# Altium PCB Vertical.PcbDoc
Units mm, origin at the board's own origin, x right, y up, seen from the top; angles counter-clockwise.
Board outline 51.82 x 30.48 mm, 2 copper layers (Top Layer, Bottom Layer); 19 components, 10 nets, 57 pads, 219 vias.
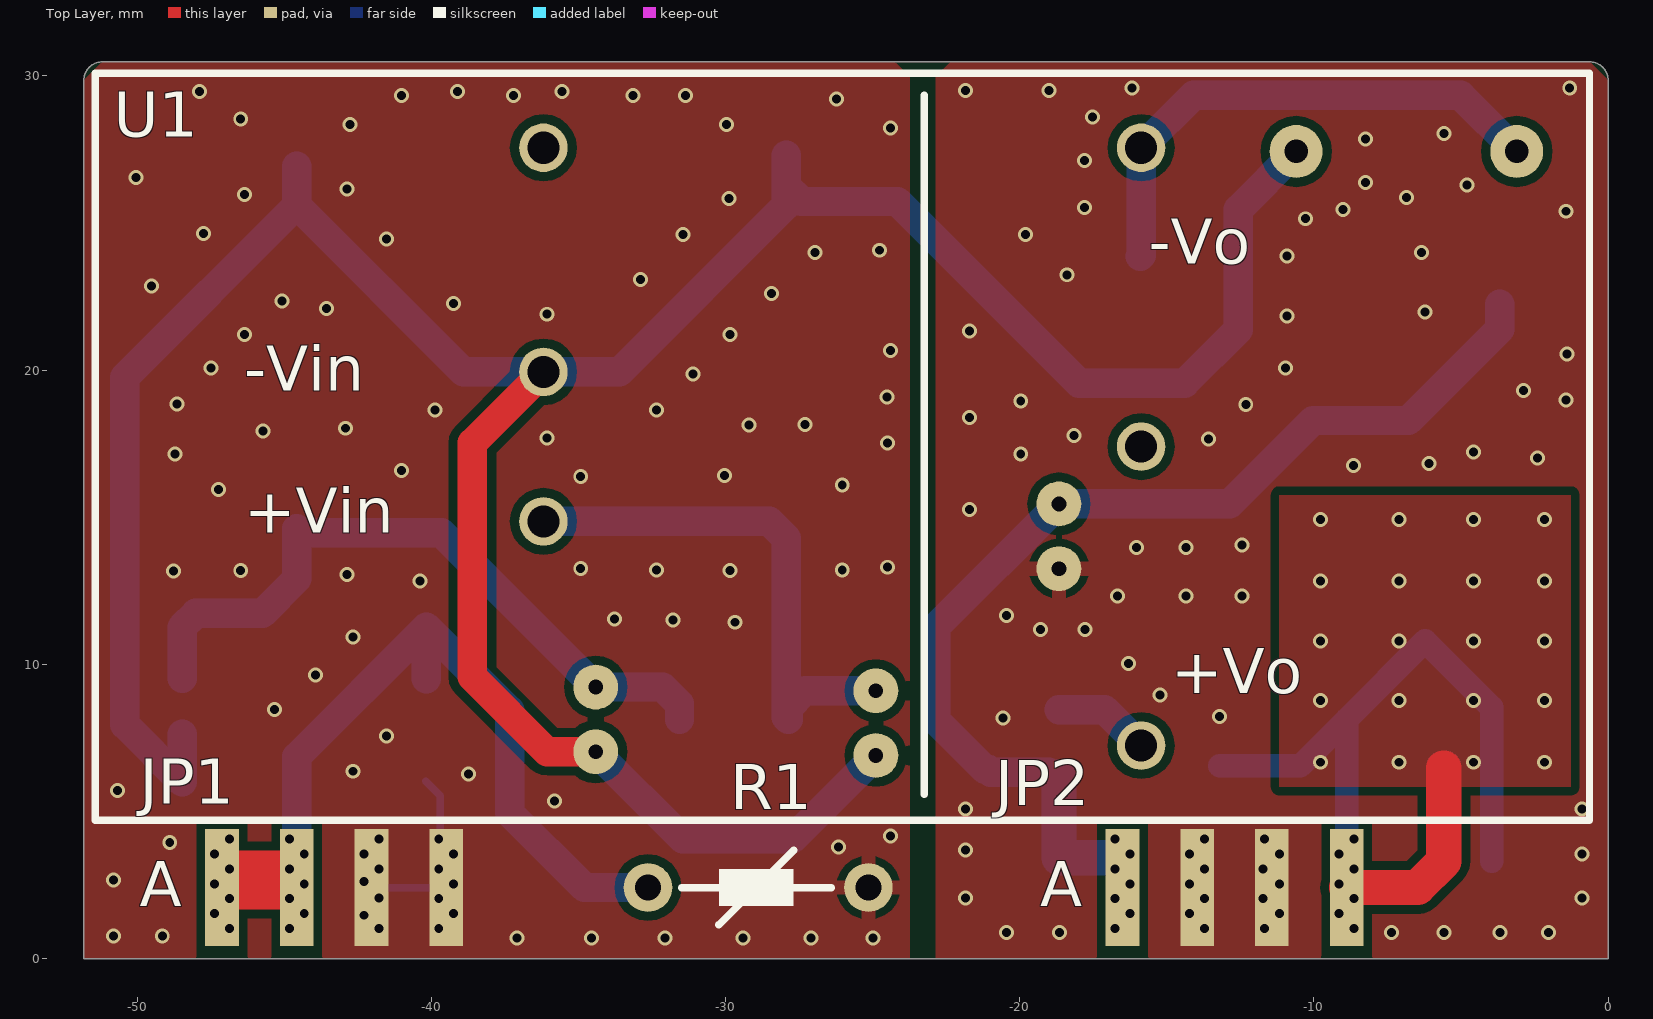
[diagram p0: Top Layer view]
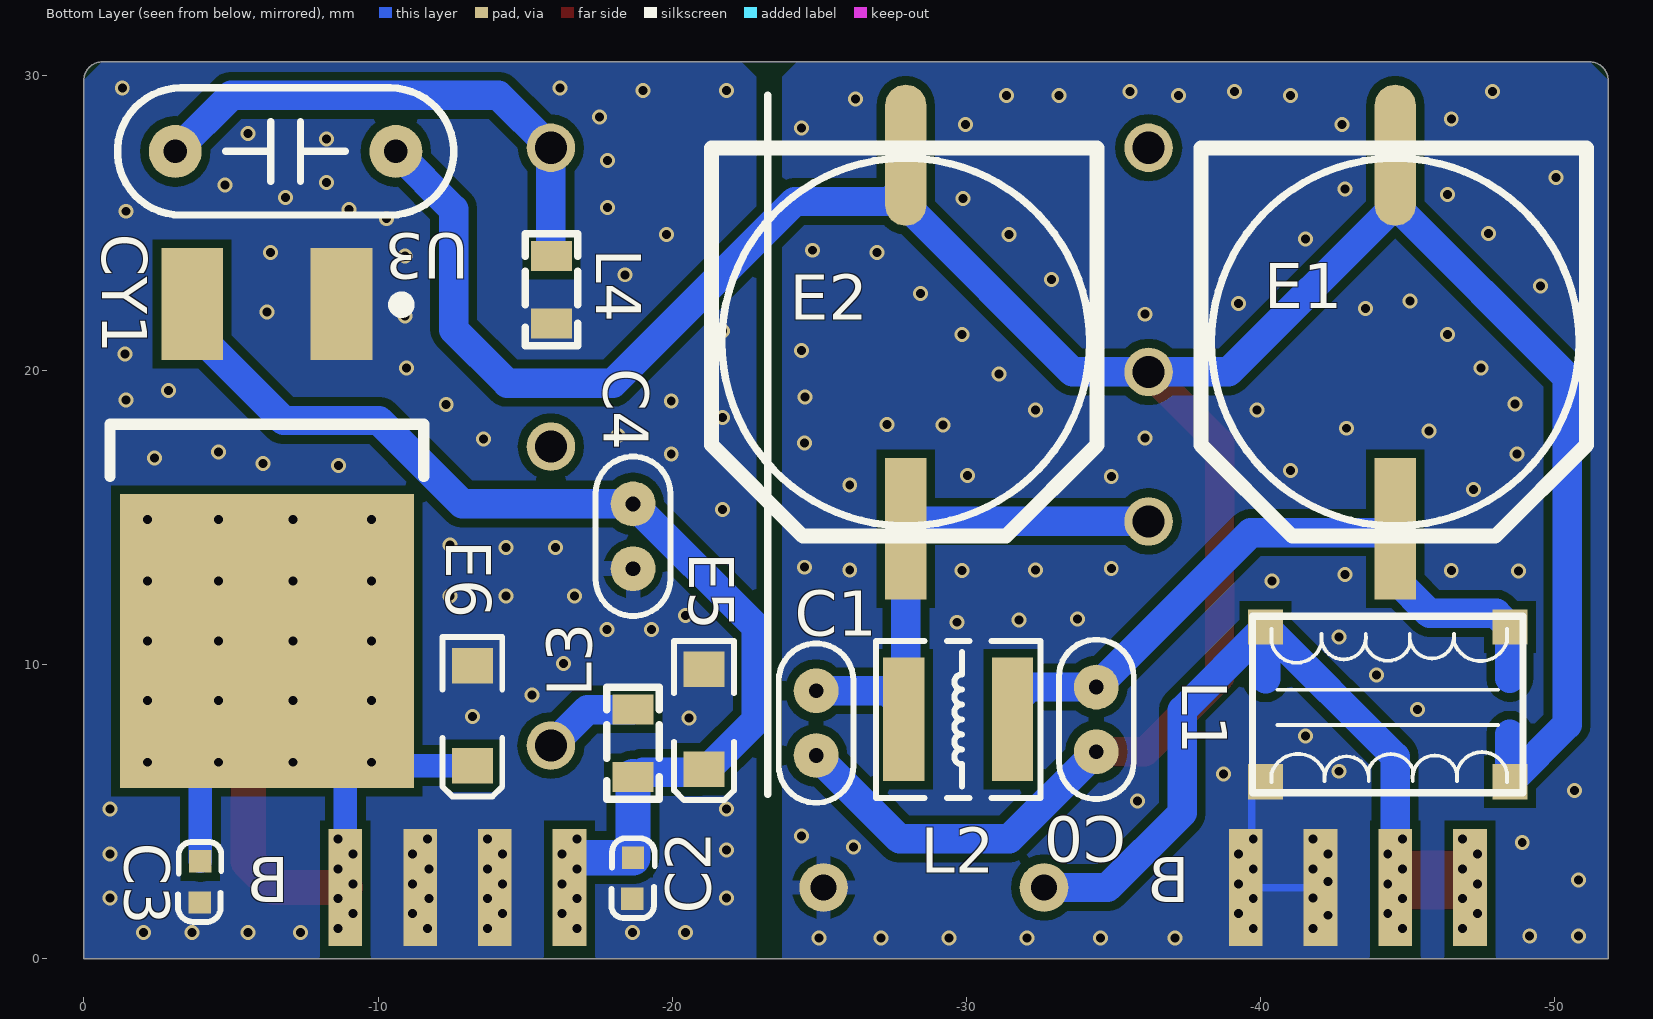
[diagram p1: Bottom Layer view, seen from below]
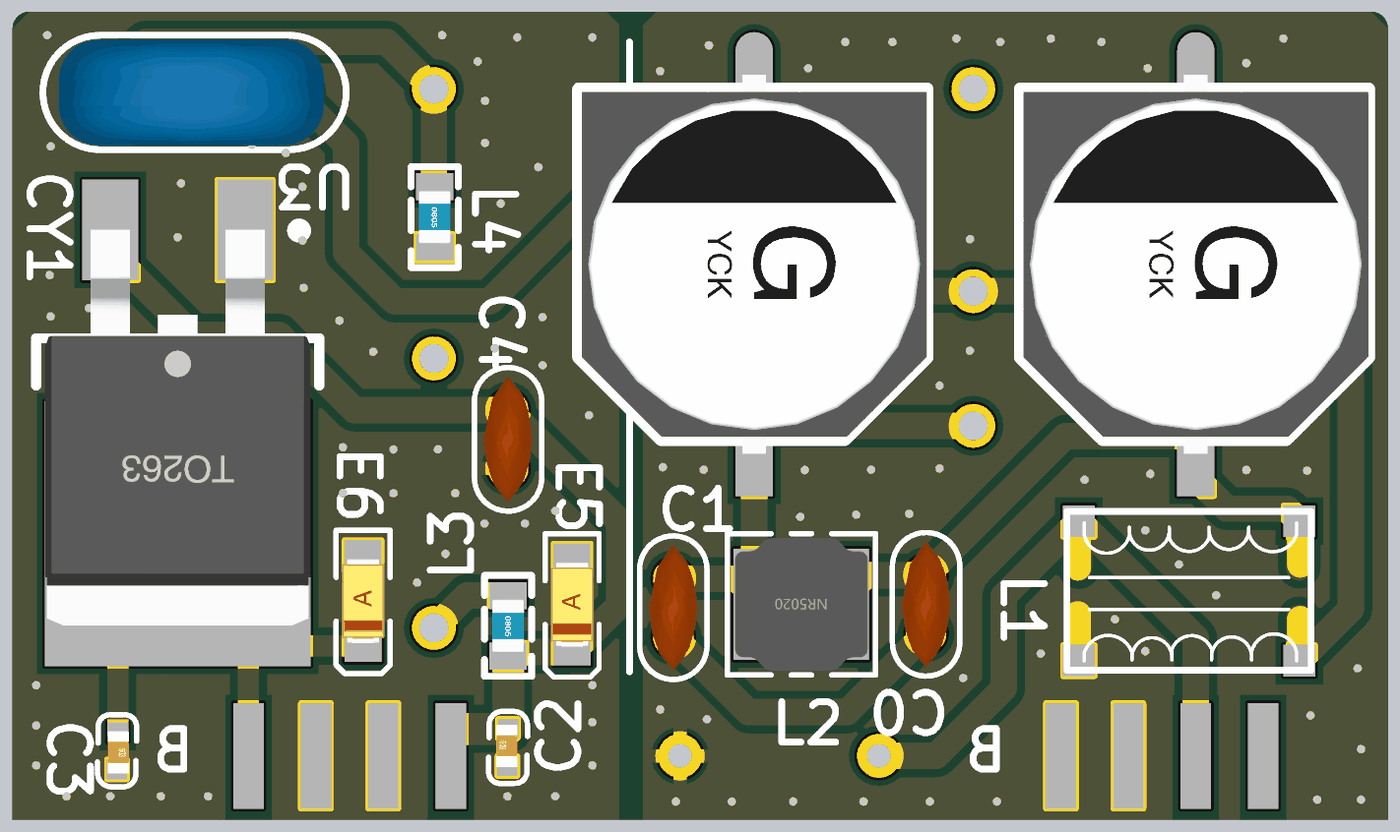
[diagram p2: 3D render of the assembled board from below, using the file's embedded part models]

## Layer stack, top to bottom
Top Solder: solder mask 0.0102, Solder Resist, Dk 3.5
Top Layer: signal copper 0.0356
Dielectric 1: dielectric 0.32, FR-4, Dk 4.8
Bottom Layer: signal copper 0.0356
Bottom Solder: solder mask 0.0102, Solder Resist, Dk 3.5

## Board outline
-51.816,0 0,0 0,29.845 ccw(c-0.635,29.845) -0.635,30.48 -51.181,30.48 ccw(c-51.181,29.845) -51.816,29.845

## Design rules (kind name [scope] priority, off if disabled: settings)
Clearance [All] p1: gap=0.3 ignorepadtopadclearanceinfootprint=FALSE except(0: Arc-Arc Arc-Track Arc-SMDPad Arc-THPad Arc-Via Arc-Text Arc-Hole Track-Track Track-SMDPad Track-THPad Track-Via Track-Text Track-Hole SMDPad-SMDPad SMDPad-THPad SMDPad-Via SMDPad-Text SMDPad-Hole THPad-THPad THPad-Via THPad-Text THPad-Hole Via-Via Via-Text Via-Hole Text-Text Text-Hole)
ComponentClearance [All] p1: gap=0.254 collisioncheckmode=3 verticalgap=0.254 showdistances=FALSE donotcheckwithout3dbody=TRUE
PlaneConnect [All] p1: planeconnectstyle=Relief reliefexpansion=0.1 reliefentries=4 reliefconductorwidth=0.4 reliefairgap=0.4
PolygonConnect [All] p1: thpad.connectstyle=Relief thpad.reliefconductorwidth=0.5 thpad.reliefentries=4 thpad.polygonreliefangle="90 Angle" thpad.airgapwidth=0.254 smdpad.connectstyle=Direct smdpad.reliefconductorwidth=0.254 smdpad.reliefentries=4 smdpad.polygonreliefangle="90 Angle" smdpad.airgapwidth=0.254 via.connectstyle=Direct via.reliefconductorwidth=0.254 via.reliefentries=4 via.polygonreliefangle="90 Angle" via.airgapwidth=0.254
RoutingVias [All] p1: holewidth=0.711 width=1.27 viastyle="Through Hole" minholewidth=0.711 minwidth=1.27 maxholewidth=5.08 maxwidth=5.08
SolderMaskExpansion [All] p1: expansion=0.102 istentingtop=FALSE
UnRoutedNet [All] p1: checkbadconnections=TRUE
Width Width_3v3 [InNet('+3.3')] p1: maxlimit=1.5 minlimit=0.5 preferedwidth=0.8 minimp=50.000000 maximp=50.000000 favimp=50.000000
Width Width_5 [InNet('+5')] p2: maxlimit=1.5 minlimit=0.6 preferedwidth=1 minimp=50.000000 maximp=50.000000 favimp=50.000000
Width [All] p3: maxlimit=1.016 minlimit=0.254 preferedwidth=0.254 minimp=50.000000 maximp=50.000000 favimp=50.000000
27 further rules are at their usual default settings.

## Components (designator, comment, footprint, x,y, rotation, side; value= is the part's Value field where it differs from the comment)
C0 "1uF/50V" "CC 2.2*5" -34.417,8.128 r270 bottom
C1 "1uF/50V" "CC 2.2*5" -24.892,8.001 r270 bottom
C2 "0.1uF" 0603C -18.635,2.027 r90 bottom
C3 "0.1uF" 0603C -3.971,3.307 r270 bottom
C4 "1uF/50V" "CC 2.2*5" -18.669,14.351 r270 bottom
CY1 "1nF/250V" "CY 7.5*10*4" -6.858,27.432 r0 bottom
E1 "470uF/50V" "CM G(12.5*13.5)" -44.577,20.955 r270 bottom
E2 "470uF/50V" "CM G(12.5*13.5)" -27.94,20.955 r270 bottom
E5 "10uF/6.3V" "CD A(3216)" -21.082,8.128 r90 bottom
E6 "10uF/6.3V" "CD A(3216)" -13.208,8.255 r90 bottom
JP1 "排针-侧 2*4" "排针-侧 2*4" -47.117,2.413 r0 top
JP2 "排针-侧 2*4" "排针-侧 2*4" -16.51,2.413 r0 top
L1 "SRF0905-202Y" SRF0905 -44.323,8.636 r180 bottom
L2 "4.7uH" NR5020 -29.718,8.128 r0 bottom
L3 "2.2uH" "L 0805" -18.669,7.317 r270 bottom
L4 "10uH" "L 0805" -15.902,22.733 r270 bottom
R1 "14D330k" 14D330k -28.829,2.413 r180 top
U1 "10D1205B" 10D1205B -51.435,4.699 r0 top
U3 "AIC1084-33CM" TO263-3B -6.223,10.795 r0 bottom

## Footprints (in the part's own frame and the unit in brackets; to place one, negate y for a bottom-side part, rotate by r counter-clockwise, add the part's x,y. Pads: shape width x height; smd on the part's side, far side on the other; paste and mask are expansions set on the pad)
10D1205B [mil]
  round 65 hole 43: 1(600,600) 2(600,400) 3(1400,100) 4(1400,500) 5(1400,900) 6(600,900)
  silkscreen extent 0,0 2000,1000
14D330k [mil]
  round 65 hole 35: 1(-145,0) 2(150,0)
  silkscreen extent -95,-50 105,50
0603C [mil]
  rect 30x30 smd: 1(0.21,-0.35) 2(55.21,-1.35)
  silkscreen extent -26,-30 81,28, body extent -1,-15 62,16, height 12
"CC 2.2*5" [mm] "脚距2.2mm直径5mm"
  round 1.524 hole 0.5: 1(-1.1,0) 2(1.1,0)
  silkscreen extent -2.71,-1.27 2.71,1.27, body extent -2.4,-0.92 2.4,0.92, height 4.8
"CD A(3216)" [mm] "长3.2mm，宽1.6mm，厚1.6mm"
  rect 1.2x1.4 smd: 1(-1.7,0) 2(1.7,0)
  silkscreen extent -2.74,-1.02 2.67,1.02, body extent -1.6,-0.8 1.6,0.8, height 1.6
"CM G(12.5*13.5)" [mm] "贴片电解电容，直径12.5mm，高13.5mm"
  rect 4.8x1.4 smd: 1(6.35,0)
  oval 4.8x1.4 smd: 2(-6.35,0)
  silkscreen extent -6.6,-6.6 6.6,6.5, body extent -7.15,-6.5 7.15,6.5, height 13.5
"CY 7.5*10*4" [mm] "脚距7.5mm，直径10mm，厚4mm"
  round 1.8 hole 0.8: 1(-3.75,0) 2(3.75,0)
  silkscreen extent -5.71,-2.16 5.71,2.16, body extent -4.88,-2 5.12,2, height 10.2
"L 0805" [mil] "小功率贴片电感"
  rect 40x55 smd: 1(-45,0) 2(45,0)
  silkscreen extent -75,-35 75,35, body extent -39,-24 39,24, height 35
NR5020 [mm] "5.0mm*5.0mm*2.0mm(长*宽*高）"
  rect 1.4x4.2 smd: 1(-1.85,0) 2(1.85,0)
  silkscreen extent -2.79,-2.67 2.79,2.67, body extent -2.5,-2.5 2.5,2.5, height 2.1
SRF0905 [mil]
  rect 47x47 smd: 1(-163.5,-103.5) 2(-163.5,103.5) 3(163.5,103.5) 4(163.5,-103.5)
  silkscreen extent -181,-118 181,118
TO263-3B [mm] "263，3脚晶体管"
  rect 2.1x3.8 smd: 1(-2.54,-11.45) 3(2.54,-11.45)
  rect 10x10 smd: 2(0,0)
  silkscreen extent -5.33,-11.63 5.33,-5.59, body extent -5,-11.46 5,3.47, height 4.5
"排针-侧 2*4" [mil]
  rect 45x157 smd: 1(0,0) 2(100,0) 3(200,0) 4(300,0)
  rect 45x157 smd far side: 5(300,0) 6(200,0) 7(100,0) 8(0,0)

## Part data
C0 C1 C4: library part C-CC, "直插瓷片电容"
C2 C3: library part CAP, "无极性电容"
CY1: library part C-CY, "高压陶瓷电容，Y电容"
E1 E2: library part C-CM, "贴片电解电容"
E5 E6: library part C-CD, "贴片钽电容"
L1: "共模电感"
L2: library part DML-5020, "差模电感"
L3 L4: library part L, "小功率贴片电感"

## Via types
v1: diameter 0.508, hole 0.305, Top Layer to Bottom Layer, tented both sides, 219 vias

## Nets (pads, with @x,y where several pads share a name; then routed paths per layer and width w, separated by ;. In a path a pad name is that pad's centre, name@x,y a point inside that pad or via, vN(x,y) a via of type N, cw(c..) or ccw(c..) an arc to the next point about the centre after c; other vN are vias at no path point)
+3.3: C3.1 E6.1 JP2.4 JP2.5 U3.2 | length 29.7
  Top Layer w1.2: JP2.4 -6.477,2.413 -5.588,3.302 -5.588,6.477
  Bottom Layer w0.8: E6.1 -10.463,6.555 U3.2@-8.89,8.128 ; JP2.5 U3.2@-8.89,8.128 ; C3.1 -3.962,8.534 U3.2 U3.2@-8.89,8.128
  other v1: -8.636,1.016 -9.144,1.524 -8.636,2.032 -9.144,2.54 -8.636,3.048 -9.144,3.556 -8.636,4.064 -9.781,6.671 -7.112,6.671 -4.572,6.671 -2.159,6.671 -9.781,8.763 -7.112,8.763 -4.572,8.763 -2.159,8.763 -9.781,10.795 -7.112,10.795 -4.572,10.795 -2.159,10.795 -9.781,12.827 -7.112,12.827 -4.572,12.827 -2.159,12.827 -9.781,14.922 -7.112,14.922 -4.572,14.922 -2.159,14.922
+5: C2.2 C4.1 E5.1 JP2.1 JP2.8 L3.2 U3.3 | length 38.2
  Bottom Layer w1: L3.2 -18.86,6.174 -19.014,6.328 -20.982,6.328 E5.1 -21.182,6.428 -22.86,8.106 -22.86,11.26 C4.1 -12.87,15.451 -10.033,18.288 -6.79,18.288 -3.683,21.395 U3.3 ; JP2.8@-16.581,3.429 -16.51,3.358 JP2.8
  Bottom Layer w1.2: L3.2 C2.2 JP2.8@-16.581,3.429
  other v1: -16.764,1.016 -16.256,1.524 -16.764,2.032 -16.256,2.54 -16.764,3.048 -16.256,3.556 -16.764,4.064
+12: JP1.1 JP1.2 JP1.7 JP1.8 L1.2 R1.2 | length 30.3
  Top Layer w0.254: v1(-46.863,4.064) -46.863,2.857 JP1.1@-46.672,2.667 ; JP1.2@-45.021,2.667 -44.831,2.857 v1(-44.831,4.064)
  Top Layer w2: JP1.1@-46.672,2.667 JP1.2@-45.021,2.667
  Bottom Layer w1: JP1.7 -44.577,6.858 L1.2 ; -40.17,9.51 L1.2 ; R1.2 -34.798,2.413 -37.338,4.953 -37.338,8.433 L1.2
  other v1: -46.863,1.016 -44.831,1.016 -47.371,1.524 -44.323,1.524 -46.863,2.032 -44.831,2.032 -47.371,2.54 -44.323,2.54 -46.863,3.048 -44.831,3.048 -47.371,3.556 -44.323,3.556
GND: C2.1 C3.2 C4.2 E5.2 E6.2 JP2.2 JP2.3 JP2.6 JP2.7 L4.2 U3.1
  other v1: -20.447,0.889 -18.644,0.889 -7.366,0.889 -5.588,0.889 -3.683,0.889 -2.032,0.889 -13.716,1.016 -11.684,1.016 -14.224,1.524 -11.176,1.524 -13.716,2.032 -11.732,2.032 -21.844,2.054 -0.889,2.054 -14.224,2.54 -11.176,2.54 -13.716,3.048 -11.732,3.048 -14.224,3.556 -11.167,3.556 -0.889,3.556 -21.844,3.683 -13.716,4.064 -11.684,4.064 -21.844,5.08 -0.889,5.08 -20.574,8.173 -13.208,8.222 -15.24,8.951 -16.311,10.035 -19.304,11.176 -17.78,11.176 -20.447,11.655 -16.678,12.319 -14.351,12.319 -12.446,12.319 -16.029,13.976 -14.351,13.97 -12.446,14.056 -21.717,15.257 -8.651,16.764 -6.096,16.82 -2.398,17.018 -19.968,17.145 -4.572,17.216 -13.589,17.653 -18.165,17.78 -21.717,18.382 -12.319,18.829 -19.968,18.956 -1.435,18.987 -2.877,19.304 -10.968,20.066 -1.397,20.545 -21.717,21.336 -10.919,21.844 -6.219,21.971 -18.392,23.241 -10.922,23.876 -6.346,24.003 -19.812,24.616 -10.295,25.146 -1.435,25.4 -9.017,25.467 -17.799,25.527 -6.858,25.87 -4.804,26.289 -8.255,26.384 -17.799,27.119 -8.255,27.853 -5.588,28.037 -17.526,28.601 -21.844,29.509 -19.014,29.509 -16.185,29.591 -1.308,29.591
NetC0_1: C0.1 E1.1 L1.3 L2.1 | length 24
  Bottom Layer w1: -48.476,9.525 L1.3 -48.006,11.735 -45.747,11.735 -44.577,12.905 E1.1 -44.45,14.478 -39.667,14.478 C0.1 -32.141,9.228 -31.568,8.655 L2.1
NetC0_2: C0.2 C1.2 CY1.1 E1.2 E2.2 L1.4 U1.1 | length 103.1
  Top Layer w1: U1.1 -38.608,17.526 -38.608,9.57 -36.066,7.028 C0.2
  Bottom Layer w1: -48.476,7.62 L1.4 -50.419,7.95 -50.419,19.763 E1.2@-44.577,25.605 ; E1.2@-44.577,26.924 E1.2@-44.577,25.605 ; C0.2 -31.453,4.064 -27.729,4.064 C1.2 ; E2.2 E2.2@-27.94,26.261 ; CY1.1 -12.573,25.467 -12.573,21.379 -14.394,19.558 -17.988,19.558 -24.162,25.732 -27.411,25.732 E2.2@-27.94,26.261 ; E1.2@-44.577,25.605 -38.911,19.939 U1.1 -33.606,19.939 -27.94,25.605 E2.2@-27.94,26.261
NetC1_1: C1.1 E2.1 L2.2 U1.2 | length 18.3
  Bottom Layer w1: U1.2 -28.513,14.859 -27.94,14.286 -27.94,8.2 L2.2 -27.868,8.528 -27.295,9.101 C1.1
NetCY1_2: CY1.2 L4.1 U1.5 | length 18
  Bottom Layer w1: L4.1 -15.875,23.903 U1.5 -14.097,29.337 -5.013,29.337 CY1.2
NetL3_1: L3.1 U1.3 | length 3.3
  Bottom Layer w1: L3.1 -17.122,8.46 -15.902,7.239 U1.3
PGND: JP1.3 JP1.4 JP1.5 JP1.6 L1.1 R1.1 | length 6.4
  Bottom Layer w0.254: JP1.6 JP1.5 -39.7,2.616 -39.7,5.537 L1.1 L1.1@-40.188,6.025
  other v1: -37.084,0.691 -34.559,0.691 -32.058,0.691 -29.408,0.691 -27.093,0.691 -24.989,0.691 -50.8,0.762 -49.149,0.762 -41.783,1.016 -39.751,1.016 -42.291,1.47 -39.243,1.524 -39.751,2.032 -41.783,2.054 -39.243,2.54 -42.291,2.616 -50.8,2.667 -41.783,3.048 -39.751,3.048 -42.291,3.556 -39.243,3.556 -26.162,3.795 -48.895,3.937 -41.783,4.064 -39.751,4.064 -24.399,4.162 -35.814,5.349 -50.673,5.715 -38.735,6.271 -42.672,6.365 -41.529,7.564 -45.339,8.471 -43.942,9.637 -42.672,10.922 -29.677,11.43 -31.783,11.509 -33.782,11.542 -40.386,12.827 -42.862,13.046 -48.768,13.173 -46.482,13.193 -29.845,13.193 -32.345,13.208 -26.035,13.208 -34.925,13.251 -24.497,13.3 -47.244,15.937 -26.035,16.095 -34.925,16.379 -30.043,16.416 -41.021,16.588 -48.712,17.145 -24.497,17.526 -36.068,17.693 -45.72,17.933 -42.926,18.025 -29.21,18.132 -27.295,18.152 -39.878,18.644 -32.345,18.644 -48.641,18.842 -24.511,19.083 -31.115,19.868 -47.498,20.066 -24.399,20.672 -46.355,21.209 -29.845,21.209 -36.068,21.9 -43.568,22.098 -39.243,22.266 -45.081,22.352 -28.444,22.606 -49.515,22.86 -32.893,23.085 -26.966,24.003 -24.765,24.074 -41.529,24.464 -31.453,24.616 -47.752,24.638 -29.887,25.833 -46.355,25.964 -42.862,26.162 -50.038,26.543 -24.399,28.235 -42.762,28.346 -29.972,28.346 -46.482,28.542 -26.233,29.21 -41.021,29.337 -37.211,29.337 -33.147,29.337 -31.369,29.337 -47.879,29.464 -39.116,29.464 -35.56,29.464
pads on no net: U1.4 U1.6

## Polygon pours and split planes (outlines as drawn)
PGND on Bottom Layer "Bottom Layer-PGND" (solid, pour order 0): -51.816,0 -51.816,29.845 -51.181,30.48 -24.257,30.48 -23.749,29.972 -23.749,0
GND on Bottom Layer "Bottom Layer-GND" (solid, pour order 6): -22.86,29.972 -22.352,30.48 -0.635,30.48 0,29.845 0,0 -22.86,0
PGND on Top Layer "Top Layer-PGND" (solid, pour order 10): -23.749,0 -51.816,0 -51.816,29.845 -51.181,30.48 -24.257,30.48 -23.779,30.002 -23.749,30.002
GND on Top Layer "Top Layer-GND" (solid, pour order 8): -22.86,0 0,0 0,29.845 -0.635,30.48 -22.352,30.48 -22.86,29.972
+3.3 on Top Layer "Top Layer-+3.3" (solid, pour order 4): -1.27,5.842 -11.176,5.842 -11.176,15.748 -1.27,15.748

## Silkscreen, mask and mechanical layers (free items; w line width, h text height)
Top Overlay:
  lines w0.254: -23.241,5.588 -23.241,29.337
Bottom Overlay:
  lines w0.254: -23.241,5.588 -23.241,29.337
Bottom Solder:
  lines w1: -48.514,6.223 -48.514,7.564 ; -48.514,9.637 -48.514,11.176 ; -40.132,5.969 -40.132,7.747 ; -40.132,9.525 -40.132,11.303
Mechanical 1:
  lines w0.254: -51.816,0 -51.816,29.845 cw(c-51.181,29.845) -51.181,30.48 -0.635,30.48 cw(c-0.635,29.845) 0,29.845 0,26.797 0,0 -51.816,0

## Text inside footprints (layer, text, board x,y; h text height)
JP1: Top Overlay "A" at -49.911,1.778 h1.52; Bottom Overlay "B" at -37.592,1.905 h1.52
JP2: Top Overlay "A" at -19.304,1.778 h1.52; Bottom Overlay "B" at -6.985,1.905 h1.52
U1: Top Overlay "-Vin" at -46.355,19.304 h1.52; Top Overlay "+Vin" at -46.355,14.478 h1.52; Top Overlay "+Vo" at -14.859,9.017 h1.52; Top Overlay "-Vo" at -15.621,23.622 h1.52